# Altium PCB PCB_V1.0.PcbDoc (part 2 of 3)
Units mil, origin at the board's own origin, x right, y up, seen from the top; angles counter-clockwise.
Board outline 2129.51 x 1160.38 mil, 4 copper layers (L1, L2(GND), L3(PWR), L4), stack 62.45 mil thick; 40 components, 40 nets, 186 pads, 192 vias.
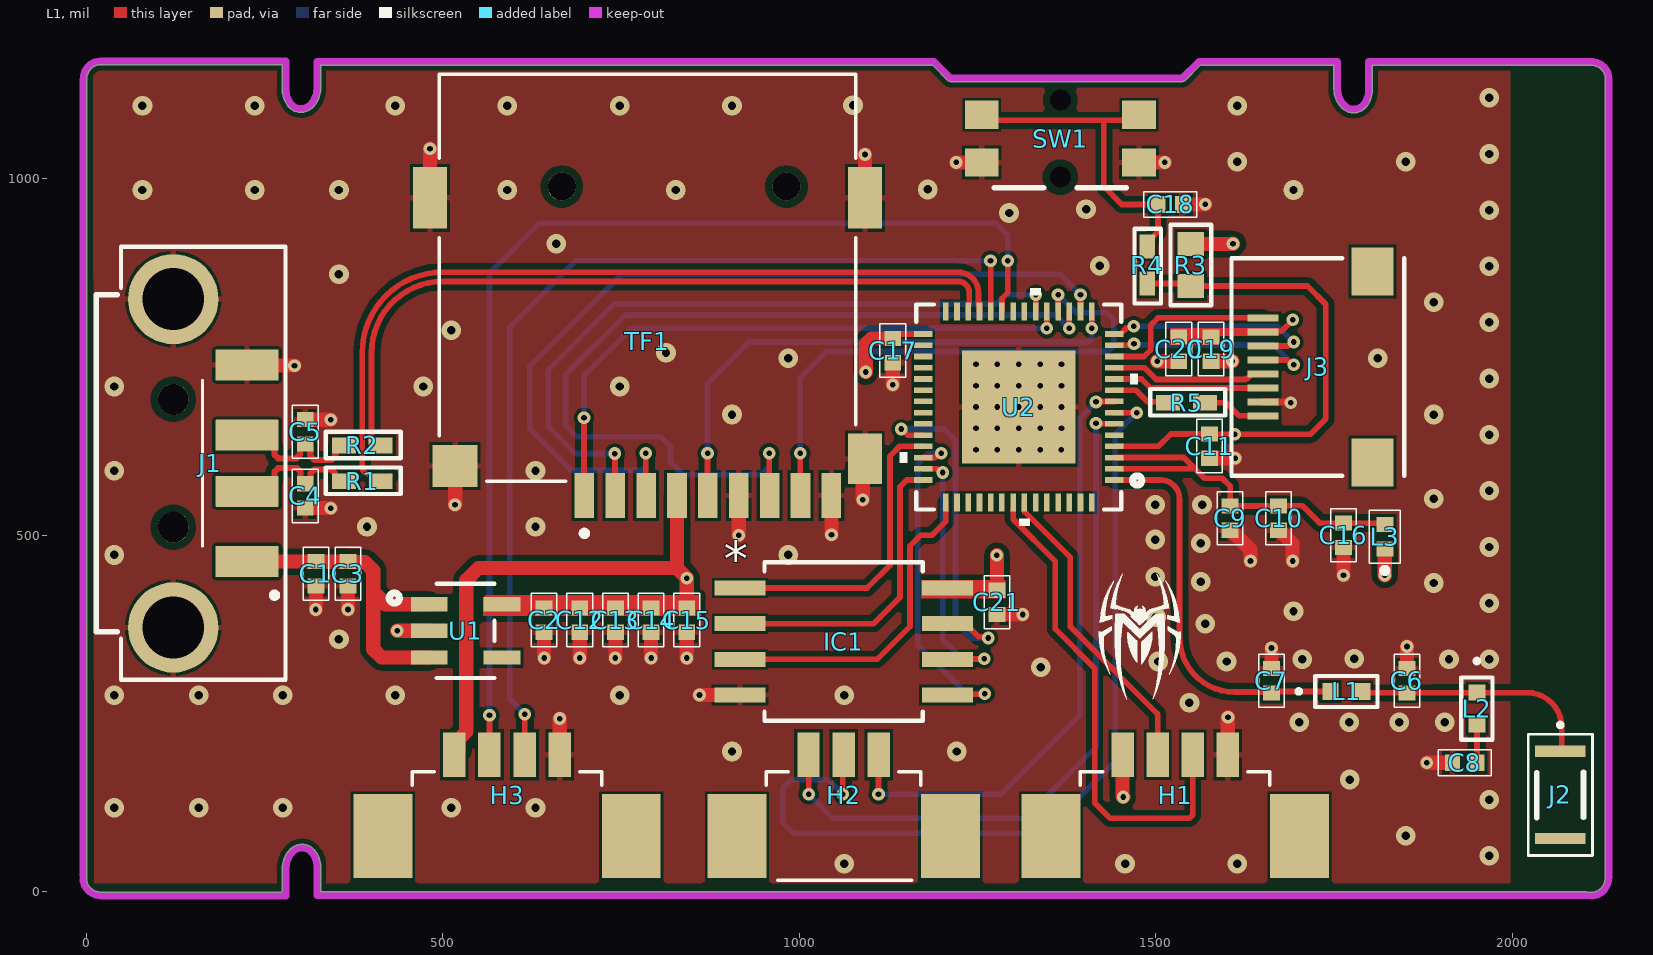
[diagram p0: L1 view]

## Part data (continued)
J1: "USB Connector, USB Type A, USB 2.0, Plug, 4 Positions, Surface Mount, Right Angle", LCSC Part=C7374540, Manufacturer=Samtec, Manufacturer Lifecycle Status=PRODUCTION, Max Operating Temperature=85°C, Max Voltage Rating (AC)=30V, Min Operating Temperature=-50°C, Supplier Part Number=SAM13046-ND, Category="Coaxial / RF Cable Assemblies", ComponentLink1Description=https://datasheet.octopart.com:443/USB-AM-S-S-B-SM1-Samtec-datasheet-97369336.pdf?src-supplier=Sager+Electronics, ComponentLink1URL=https://datasheet.octopart.com:443/USB-AM-S-S-B-SM1-Samtec-datasheet-97369336.pdf?src-supplier=Sager+Electronics, ComponentLink2Description=https://datasheet.octopart.com:443/USB-AM-S-S-B-SM1-Samtec-datasheet-154665717.pdf?src-supplier=Sager+Electronics, ComponentLink2URL=https://datasheet.octopart.com:443/USB-AM-S-S-B-SM1-Samtec-datasheet-154665717.pdf?src-supplier=Sager+Electronics, ComponentLink3Description=https://sigma.octopart.com:443/97369342/technical_drawing/Samtec-USB-AM-S-S-B-SM1.pdf?src-supplier=Samtec, ComponentLink3URL=https://sigma.octopart.com:443/97369342/technical_drawing/Samtec-USB-AM-S-S-B-SM1.pdf?src-supplier=Samtec, ComponentLink4Description=https://datasheet.octopart.com:443/USB-AM-S-S-B-SM1-Samtec-datasheet-150883678.pdf?src-supplier=Electro+Sonic, ComponentLink4URL=https://datasheet.octopart.com:443/USB-AM-S-S-B-SM1-Samtec-datasheet-150883678.pdf?src-supplier=Electro+Sonic, ComponentLink5Description=https://datasheet.octopart.com:443/USB-AM-S-S-B-SM1-Samtec-datasheet-130009934.pdf?src-supplier=Electro+Sonic, ComponentLink5URL=https://datasheet.octopart.com:443/USB-AM-S-S-B-SM1-Samtec-datasheet-130009934.pdf?src-supplier=Electro+Sonic, ComponentLink6Description=https://datasheet.octopart.com:443/USB-AM-S-S-B-SM1-Samtec-datasheet-21561734.pdf?src-supplier=Farnell, ComponentLink6URL=https://datasheet.octopart.com:443/USB-AM-S-S-B-SM1-Samtec-datasheet-21561734.pdf?src-supplier=Farnell, ComponentLink7Description=https://datasheet.octopart.com:443/USB-AM-S-S-B-SM1-Samtec-datasheet-180264035.pdf?src-supplier=JRH+Electronics, ComponentLink7URL=https://datasheet.octopart.com:443/USB-AM-S-S-B-SM1-Samtec-datasheet-180264035.pdf?src-supplier=JRH+Electronics, ComponentLink8Description=https://datasheet.octopart.com:443/USB-AM-S-S-B-SM1-Samtec-datasheet-120095689.pdf?src-supplier=Toby+Electronics, ComponentLink8URL=https://datasheet.octopart.com:443/USB-AM-S-S-B-SM1-Samtec-datasheet-120095689.pdf?src-supplier=Toby+Electronics, ComponentLink9Description=https://datasheet.octopart.com:443/USB-AM-S-S-B-SM1-Samtec-datasheet-116536465.pdf?src-supplier=Toby+Electronics, ComponentLink9URL=https://datasheet.octopart.com:443/USB-AM-S-S-B-SM1-Samtec-datasheet-116536465.pdf?src-supplier=Toby+Electronics, ComponentLink10Description=https://datasheet.octopart.com:443/USB-AM-S-S-B-SM1-Samtec-datasheet-13694303.pdf?src-supplier=_legacy+Avnet, ComponentLink10URL=https://datasheet.octopart.com:443/USB-AM-S-S-B-SM1-Samtec-datasheet-13694303.pdf?src-supplier=_legacy+Avnet, Contact Material=Bronze, Contact Plating=Gold, Depth=20.7mm, Gender=Male, Housing Material=Thermoplastic, Length=12.5mm, Lifecycle Status=Production, Manufacturer Part Number=USB-AM-S-S-B-SM1, Mounting Technology="Surface Mount", Number of Contacts=4, Number of Ports=1, Number of Terminals=4, Orientation="Right Angle", Packaging=Bulk, Pricing="1=3,56, 50=2,901, 100=2,462, 500=2,345 (USD)", Radiation Hardening=No, RoHS=Compliant, Stock=10, Supplier=DigiKey, Termination=Solder
J2: library part ANT3216LL00R2400A, "CERAMIC HELIX CHIP ANTENNA, 433MHZ, 1204; Available until stocks are exhausted", Clock Frequency=2.5GHz, LCSC Part=C22423581, Manufacturer="Yageo Group", Max Operating Temperature=105°C, Min Operating Temperature=-40°C, Supplier Part Number=311-4590-6-ND, Body Material=Ceramic, Category="RF Antennas", ComponentLink1Description=https://datasheet.octopart.com:443/ANT3216LL00R2400A-Pulse-datasheet-159152929.pdf?src-supplier=Electro+Sonic, ComponentLink1URL=https://datasheet.octopart.com:443/ANT3216LL00R2400A-Pulse-datasheet-159152929.pdf?src-supplier=Electro+Sonic, ComponentLink2Description=https://datasheet.octopart.com:443/ANT3216LL00R2400A-Yageo-datasheet-181541429.pdf?src-supplier=IHS, ComponentLink2URL=https://datasheet.octopart.com:443/ANT3216LL00R2400A-Yageo-datasheet-181541429.pdf?src-supplier=IHS, ComponentLink3Description=http://sigma.octopart.com:80/conflict_mineral_statement/Yageo-company-3.pdf?src-supplier=Compliance+Statements, ComponentLink3URL=http://sigma.octopart.com:80/conflict_mineral_statement/Yageo-company-3.pdf?src-supplier=Compliance+Statements, ComponentLink4Description=http://sigma.octopart.com:80/rohs_statement/Yageo-company-2.pdf?src-supplier=Compliance+Statements, ComponentLink4URL=http://sigma.octopart.com:80/rohs_statement/Yageo-company-2.pdf?src-supplier=Compliance+Statements, Country of Origin="Mainland China, Taiwan", Impedance=50Ω, Introduction Date=2013-03-27, Lifecycle Status=Production, Manufacturer Part Number=ANT3216LL00R2400A, Mounting Technology="Surface Mount", Number of Terminals=2, Pricing="1=0,46, 10=0,32, 25=0,2852, 100=0,2473, 250=0,22916, 500=0,21822, 1000=0,20921 (USD)", REACH SVHC=Yes, RoHS=Compliant, Stock=12714, Supplier=DigiKey
J3: "Conn FFC/FPC Connector SKT 8 POS 0.5mm Solder RA SMD Reel", Ambient Temperature Range High=85°C, Contact Resistance=50mΩ, Current Rating=500mA, Dielectric Material="Liquid Crystal Polymer", Flammability Rating="UL94 V-0", Insulation Resistance=100MΩ, LCSC Part=C3195305, Manufacturer="Omron Electronics Inc-EMC Div", Max Voltage Rating (DC)=5.05kV, Min Operating Temperature=-30°C, Supplier Part Number=OR1109CT-ND, Voltage Rating=50V, Actuator Material="Liquid Crystal Polymer, Polymer", Category="Card Edge Connectors", ComponentLink1Description=https://datasheet.octopart.com:443/XF2M-0815-1A-Omron-datasheet-67143946.pdf?src-supplier=Farnell, ComponentLink1URL=https://datasheet.octopart.com:443/XF2M-0815-1A-Omron-datasheet-67143946.pdf?src-supplier=Farnell, ComponentLink2Description=https://datasheet.octopart.com:443/XF2M-0815-1A-Omron-datasheet-48845614.pdf?src-supplier=element14+APAC, ComponentLink2URL=https://datasheet.octopart.com:443/XF2M-0815-1A-Omron-datasheet-48845614.pdf?src-supplier=element14+APAC, ComponentLink3Description=https://datasheet.octopart.com:443/XF2M-0815-1A-Omron-datasheet-21210793.pdf?src-supplier=Sager+Electronics, ComponentLink3URL=https://datasheet.octopart.com:443/XF2M-0815-1A-Omron-datasheet-21210793.pdf?src-supplier=Sager+Electronics, ComponentLink4Description=https://datasheet.octopart.com:443/XF2M-0815-1A-Omron-datasheet-150021820.pdf?src-supplier=Sager+Electronics, ComponentLink4URL=https://datasheet.octopart.com:443/XF2M-0815-1A-Omron-datasheet-150021820.pdf?src-supplier=Sager+Electronics, ComponentLink5Description=https://datasheet.octopart.com:443/XF2M-0815-1A-Omron-datasheet-140570497.pdf?src-supplier=Arrow.cn, ComponentLink5URL=https://datasheet.octopart.com:443/XF2M-0815-1A-Omron-datasheet-140570497.pdf?src-supplier=Arrow.cn, ComponentLink6Description=https://datasheet.octopart.com:443/XF2M-0815-1A-Omron-datasheet-17455137.pdf?src-supplier=Electro+Sonic, ComponentLink6URL=https://datasheet.octopart.com:443/XF2M-0815-1A-Omron-datasheet-17455137.pdf?src-supplier=Electro+Sonic, Contact Location=Side, Contact Material="Gold, Nickel", Contact Plating=Gold, Export Control Classification Number (ECCN) Code=EAR99, Gender=Receptacle, Height=3.1mm, Housing Material=Polymer, Introduction Date=2012-09-26, Lead Free="Lead Free", Lifecycle Status=Production, Manufacturer Part Number=XF2M-0815-1A, Max Current Rating=500mA, Max Operating Temperature=85°C, Mounting Technology="Surface Mount", Number of Contacts=8, Number of Positions=8, Number of Rows=1, Orientation="Right Angle", Packaging="Tape & Reel (TR)", Pitch=508µm, Plating Thickness=152.4nm, Pricing="1=1,33, 10=1,14, 50=1, 100=0,963, 1000=0,774, 10000=0,694 (USD)", REACH SVHC=Yes, RoHS=Compliant, Schedule B="8536694040, 8536694040|8536694040|8536694040|8536694040|8536694040", Stock=7488, Supplier=Digikey, Terminal Pitch=508µm, Termination=Solder, Voltage Rating (AC)=50V, Wire/Cable Type="Flat Flex"
L1: "General Purpose Inductor, 0.0027uH, 7.4074%, 1 Element, Ceramic-Core, SMD, 0402", Case Code (Imperial)=0402, Case Code (Metric)=1005, Current Rating=900mA, DC Resistance (DCR)=70mΩ, LCSC Part=C434841, Manufacturer=TDK, Manufacturer Lifecycle Status=PRODUCTION, Max Operating Temperature=125°C, Min Operating Temperature=-55°C, Self Resonant Frequency=6.5GHz, Supplier Part Number=445-172420-2-ND, Test Frequency=100MHz, Tolerance=0.07%, Case/Package=0402, Category="Fixed Inductors", ComponentLink1Description=https://datasheet.octopart.com:443/MHQ1005P2N7CT000-TDK-datasheet-181268076.pdf?src-supplier=IHS, ComponentLink1URL=https://datasheet.octopart.com:443/MHQ1005P2N7CT000-TDK-datasheet-181268076.pdf?src-supplier=IHS, ComponentLink2Description=https://datasheet.octopart.com:443/MHQ1005P2N7CT000-TDK-datasheet-155380095.pdf?src-supplier=ODG+(Origin+Data+Global), ComponentLink2URL=https://datasheet.octopart.com:443/MHQ1005P2N7CT000-TDK-datasheet-155380095.pdf?src-supplier=ODG+(Origin+Data+Global), ComponentLink3Description=https://datasheet.octopart.com:443/MHQ1005P2N7CT000-TDK-datasheet-136874815.pdf?src-supplier=TME, ComponentLink3URL=https://datasheet.octopart.com:443/MHQ1005P2N7CT000-TDK-datasheet-136874815.pdf?src-supplier=TME, ComponentLink4Description=https://datasheet.octopart.com:443/MHQ1005P2N7CT000-TDK-datasheet-41546101.pdf?src-supplier=Future+Electronics, ComponentLink4URL=https://datasheet.octopart.com:443/MHQ1005P2N7CT000-TDK-datasheet-41546101.pdf?src-supplier=Future+Electronics, Core Material=Ceramic, Export Control Classification Number (ECCN) Code=EAR99, Harmonized Tariff Schedule (HTS) Code=8504.50.80.00, Height=500µm, Height - Seated (Max)=609.6µm, Introduction Date=2013-10-01, Length=1mm, Lifecycle Status=Production, Manufacturer Part Number=MHQ1005P2N7CT000, Max Current Rating=900mA, Max DC Current=900mA, Max Length=1.05mm, Max Width=650µm, Min Length=950µm, Min Width=550µm, Mounting Technology="Surface Mount", Number of Circuits=1, Number of Terminals=2, Packaging="Cut Tape (CT)", Pricing="10000=0,05758, 20000=0,0543, 30000=0,05247, 50000=0,05025, 70000=0,04884, 100000=0,04739 (USD)", Q Factor=23, REACH SVHC=Yes, RoHS=Compliant, Shielding=Unshielded, Stock=10000, Supplier=DigiKey, Termination=SMD/SMT, Weight=652.039032µg, Width=600µm
L3: "General Purpose Inductor, 0.002uH, 10%, 1 Element, Reflow soldering, 1005/0402", Case/Package=0402, Current Rating=900mA, DC Resistance (DCR)=90mΩ, LCSC Part=C2043639, Manufacturer=Murata, Manufacturer Lifecycle Status="IN PRODUCTION", Max Operating Temperature=125°C, Min Operating Temperature=-55°C, Self Resonant Frequency=6GHz, Supplier Part Number=490-15076-6-ND, Test Frequency=100MHz, Tolerance=10%, Category="Fixed Inductors", ComponentLink1Description=https://datasheet.octopart.com:443/LQG15HN2N0C02D-Murata-datasheet-141286051.pdf?src-supplier=Ciiva, ComponentLink1URL=https://datasheet.octopart.com:443/LQG15HN2N0C02D-Murata-datasheet-141286051.pdf?src-supplier=Ciiva, ComponentLink2Description=https://datasheet.octopart.com:443/LQG15HN2N0C02D-Murata-datasheet-140712106.pdf?src-supplier=Ciiva, ComponentLink2URL=https://datasheet.octopart.com:443/LQG15HN2N0C02D-Murata-datasheet-140712106.pdf?src-supplier=Ciiva, ComponentLink3Description=https://datasheet.octopart.com:443/LQG15HN2N0C02D-Murata-datasheet-138753224.pdf?src-supplier=Ciiva, ComponentLink3URL=https://datasheet.octopart.com:443/LQG15HN2N0C02D-Murata-datasheet-138753224.pdf?src-supplier=Ciiva, ComponentLink4Description=https://datasheet.octopart.com:443/LQG15HN2N0C02D-Murata-datasheet-142219898.pdf?src-supplier=Arrow.cn, ComponentLink4URL=https://datasheet.octopart.com:443/LQG15HN2N0C02D-Murata-datasheet-142219898.pdf?src-supplier=Arrow.cn, ComponentLink5Description=https://datasheet.octopart.com:443/LQG15HN2N0C02D-Murata-datasheet-140568920.pdf?src-supplier=Arrow.cn, ComponentLink5URL=https://datasheet.octopart.com:443/LQG15HN2N0C02D-Murata-datasheet-140568920.pdf?src-supplier=Arrow.cn, ComponentLink6Description=https://datasheet.octopart.com:443/LQG15HN2N0C02D-Murata-datasheet-145449623.pdf?src-supplier=Geoflip, ComponentLink6URL=https://datasheet.octopart.com:443/LQG15HN2N0C02D-Murata-datasheet-145449623.pdf?src-supplier=Geoflip, ComponentLink7Description=https://datasheet.octopart.com:443/LQG15HN2N0C02D-Murata-datasheet-140317006.pdf?src-supplier=Farnell, ComponentLink7URL=https://datasheet.octopart.com:443/LQG15HN2N0C02D-Murata-datasheet-140317006.pdf?src-supplier=Farnell, ComponentLink8Description=http://sigma.octopart.com:80/reach_statement/Murata-company-16.pdf?src-supplier=Compliance+Statements, ComponentLink8URL=http://sigma.octopart.com:80/reach_statement/Murata-company-16.pdf?src-supplier=Compliance+Statements, Core Material=Air, Country of Origin=Japan, ESR=90mΩ, Export Control Classification Number (ECCN) Code=EAR99, Harmonized Tariff Schedule (HTS) Code=8504.50.80.00, Height=500µm, Introduction Date=2018-02-22, Length=1mm, Lifecycle Status=Production, Manufacturer Part Number=LQG15HN2N0C02D, Max Current Rating=900mA, Number of Circuits=1, Number of Terminals=2, Pricing="1=0,1, 10=0,045, 25=0,0416, 50=0,039, 100=0,0368, 250=0,03408, 500=0,03212, 1000=0,03028, 2500=0,02801 (USD)", Q Factor=8, REACH SVHC=Yes, RMS Current (Irms)=900mA, RoHS=Compliant, Schedule B="8504500000, 8504500000|8504500000|8504500000|8504500000|8504500000", Shielding=Unshielded, Stock=65005, Supplier=DigiKey, Width=500µm
R1 R2 R4 R5: "GENERAL PURPOSE CHIP RESISTOR Metal Glaze/thick Film, 0.0625W, 0ohm, Surface Mount, 0402", Case Code (Imperial)=0402, LCSC Part=C60485, Manufacturer="Yageo Group", Max Operating Temperature=155°C, Max Power Dissipation=63mW, Min Operating Temperature=-55°C, Power Rating=62.5mW, Supplier Part Number=311-0.0JRDKR-ND, Temperature Coefficient=200ppm/°C, Tolerance=5%, Voltage Rating=50V, Case/Package=0402, Category="Chip SMD Resistors", China RoHS=Non-Compliant, ComponentLink1Description=https://datasheet.octopart.com:443/RC0402JR-070RL-Yageo-datasheet-182189538.pdf?src-supplier=IHS, ComponentLink1URL=https://datasheet.octopart.com:443/RC0402JR-070RL-Yageo-datasheet-182189538.pdf?src-supplier=IHS, ComponentLink2Description=https://datasheet.octopart.com:443/RC0402JR-070RL-Yageo-datasheet-10408619.pdf?src-supplier=Newark, ComponentLink2URL=https://datasheet.octopart.com:443/RC0402JR-070RL-Yageo-datasheet-10408619.pdf?src-supplier=Newark, ComponentLink3Description=https://datasheet.octopart.com:443/RC0402JR-070RL-Yageo-Group-datasheet-181964826.pdf?src-supplier=Newark, ComponentLink3URL=https://datasheet.octopart.com:443/RC0402JR-070RL-Yageo-Group-datasheet-181964826.pdf?src-supplier=Newark, ComponentLink4Description=https://datasheet.octopart.com:443/RC0402JR-070RL-Yageo-Group-datasheet-190305687.pdf?src-supplier=Future+Electronics, ComponentLink4URL=https://datasheet.octopart.com:443/RC0402JR-070RL-Yageo-Group-datasheet-190305687.pdf?src-supplier=Future+Electronics, ComponentLink5Description=https://datasheet.octopart.com:443/RC0402JR-070RL-Yageo-datasheet-164759695.pdf?src-supplier=Future+Electronics, ComponentLink5URL=https://datasheet.octopart.com:443/RC0402JR-070RL-Yageo-datasheet-164759695.pdf?src-supplier=Future+Electronics, ComponentLink6Description=https://datasheet.octopart.com:443/RC0402JR-070RL-Yageo-datasheet-137700087.pdf?src-supplier=Future+Electronics, ComponentLink6URL=https://datasheet.octopart.com:443/RC0402JR-070RL-Yageo-datasheet-137700087.pdf?src-supplier=Future+Electronics, ComponentLink7Description=https://datasheet.octopart.com:443/RC0402JR-070RL-Yageo-datasheet-12531192.pdf?src-supplier=Seeed+Studio, ComponentLink7URL=https://datasheet.octopart.com:443/RC0402JR-070RL-Yageo-datasheet-12531192.pdf?src-supplier=Seeed+Studio, ComponentLink8Description=https://datasheet.octopart.com:443/RC0402JR-070RL-Yageo-datasheet-8324527.pdf?src-supplier=TME, ComponentLink8URL=https://datasheet.octopart.com:443/RC0402JR-070RL-Yageo-datasheet-8324527.pdf?src-supplier=TME, ComponentLink9Description=https://datasheet.octopart.com:443/RC0402JR-070RL-Yageo-datasheet-62067350.pdf?src-supplier=Farnell, ComponentLink9URL=https://datasheet.octopart.com:443/RC0402JR-070RL-Yageo-datasheet-62067350.pdf?src-supplier=Farnell, ComponentLink10Description=https://datasheet.octopart.com:443/RC0402JR-070RL-Yageo-datasheet-8329306.pdf?src-supplier=element14, ComponentLink10URL=https://datasheet.octopart.com:443/RC0402JR-070RL-Yageo-datasheet-8329306.pdf?src-supplier=element14, ComponentLink11Description=https://datasheet.octopart.com:443/RC0402JR-070RL-Yageo-datasheet-505231.pdf?src-supplier=element14, ComponentLink11URL=https://datasheet.octopart.com:443/RC0402JR-070RL-Yageo-datasheet-505231.pdf?src-supplier=element14, ComponentLink12Description=https://datasheet.octopart.com:443/RC0402JR-070RL-Yageo-datasheet-175423674.pdf?src-supplier=SOS+electronic, ComponentLink12URL=https://datasheet.octopart.com:443/RC0402JR-070RL-Yageo-datasheet-175423674.pdf?src-supplier=SOS+electronic, ComponentLink13Description=https://datasheet.octopart.com/RC0402JR-070RL-Yageo-datasheet-73766026.pdf, ComponentLink13URL=https://datasheet.octopart.com/RC0402JR-070RL-Yageo-datasheet-73766026.pdf, ComponentLink14Description=http://sigma.octopart.com:80/conflict_mineral_statement/Yageo-company-3.pdf?src-supplier=Compliance+Statements, ComponentLink14URL=http://sigma.octopart.com:80/conflict_mineral_statement/Yageo-company-3.pdf?src-supplier=Compliance+Statements, ComponentLink15Description=http://sigma.octopart.com:80/rohs_statement/Yageo-company-2.pdf?src-supplier=Compliance+Statements, ComponentLink15URL=http://sigma.octopart.com:80/rohs_statement/Yageo-company-2.pdf?src-supplier=Compliance+Statements, Composition="Thick Film", Contact Plating=Tin, Depth=500µm, Features="Moisture Resistant", Height=350µm, Lead Free="Lead Free", Length=1mm, Lifecycle Status=Production, Manufacturer Part Number=RC0402JR-070RL, Military Standard=Not, Mounting Technology="Surface Mount", Number of Terminals=2, Number of Terminations=2, Packaging="Tape & Reel", Pins=2, Pricing="1=0,1, 10=0,010, 25=0,0064, 50=0,0056, 100=0,0048, 250=0,00404, 500=0,00356, 1000=0,00313, 5000=0,00237 (USD)", Radiation Hardening=No, REACH SVHC=Yes, RoHS=Compliant, Schedule B="8533290000, 8533290000|8533290000, 8533290000|8533290000|8533290000, 8533290000|8533290000|8533290000|8533290000", Stock=12719023, Supplier=DigiKey, Termination=SMD/SMT, Voltage Rating (DC)=50V, Width=500µm
R3: "Fixed Resistor, Metal Glaze/Thick Film, 0.1W, 10000ohm, 75V, 1% +/-Tol, Surface Mount, 0603", Case Code (Imperial)=0603, LCSC Part=C844918, Manufacturer=Vishay, Max Operating Temperature=155°C, Max Power Dissipation=100mW, Min Operating Temperature=-55°C, Ratings=AEC-Q200, Supplier Part Number=541-10.0KHCT-ND, Temperature Coefficient=100ppm/°C, Tolerance=1%, Voltage Rating=75V, Case/Package=0603, Category="Chip SMD Resistors", China RoHS=Non-Compliant, ComponentLink1Description=https://datasheet.octopart.com:443/CRCW060310K0FKEA-Vishay-datasheet-175423584.pdf?src-supplier=IHS, ComponentLink1URL=https://datasheet.octopart.com:443/CRCW060310K0FKEA-Vishay-datasheet-175423584.pdf?src-supplier=IHS, ComponentLink2Description=https://datasheet.octopart.com:443/CRCW060310K0FKEA-Vishay-datasheet-5300368.pdf?src-supplier=Future+Electronics, ComponentLink2URL=https://datasheet.octopart.com:443/CRCW060310K0FKEA-Vishay-datasheet-5300368.pdf?src-supplier=Future+Electronics, ComponentLink3Description=https://datasheet.octopart.com:443/CRCW060310K0FKEA-Vishay-datasheet-62316122.pdf?src-supplier=Future+Electronics, ComponentLink3URL=https://datasheet.octopart.com:443/CRCW060310K0FKEA-Vishay-datasheet-62316122.pdf?src-supplier=Future+Electronics, ComponentLink4Description=https://datasheet.octopart.com:443/CRCW060310K0FKEA-Vishay-datasheet-141434677.pdf?src-supplier=Upverter, ComponentLink4URL=https://datasheet.octopart.com:443/CRCW060310K0FKEA-Vishay-datasheet-141434677.pdf?src-supplier=Upverter, ComponentLink5Description=https://datasheet.octopart.com:443/CRCW060310K0FKEA-Vishay-datasheet-83961561.pdf?src-supplier=Newark, ComponentLink5URL=https://datasheet.octopart.com:443/CRCW060310K0FKEA-Vishay-datasheet-83961561.pdf?src-supplier=Newark, ComponentLink6Description=https://datasheet.octopart.com:443/CRCW060310K0FKEA-Vishay-datasheet-14722531.pdf?src-supplier=Newark, ComponentLink6URL=https://datasheet.octopart.com:443/CRCW060310K0FKEA-Vishay-datasheet-14722531.pdf?src-supplier=Newark, ComponentLink7Description=https://datasheet.octopart.com:443/CRCW060310K0FKEA-Vishay-datasheet-11516975.pdf?src-supplier=Newark, ComponentLink7URL=https://datasheet.octopart.com:443/CRCW060310K0FKEA-Vishay-datasheet-11516975.pdf?src-supplier=Newark, ComponentLink8Description=https://datasheet.octopart.com:443/CRCW060310K0FKEA-Vishay-datasheet-41302739.pdf?src-supplier=Newark, ComponentLink8URL=https://datasheet.octopart.com:443/CRCW060310K0FKEA-Vishay-datasheet-41302739.pdf?src-supplier=Newark, ComponentLink9Description=https://datasheet.octopart.com:443/CRCW060310K0FKEA-Vishay-datasheet-33013972.pdf?src-supplier=Newark, ComponentLink9URL=https://datasheet.octopart.com:443/CRCW060310K0FKEA-Vishay-datasheet-33013972.pdf?src-supplier=Newark, ComponentLink10Description=https://datasheet.octopart.com:443/CRCW060310K0FKEA-Vishay-datasheet-21226360.pdf?src-supplier=Newark, ComponentLink10URL=https://datasheet.octopart.com:443/CRCW060310K0FKEA-Vishay-datasheet-21226360.pdf?src-supplier=Newark, ComponentLink11Description=https://datasheet.octopart.com:443/CRCW060310K0FKEA-Vishay-datasheet-62317933.pdf?src-supplier=element14+APAC, ComponentLink11URL=https://datasheet.octopart.com:443/CRCW060310K0FKEA-Vishay-datasheet-62317933.pdf?src-supplier=element14+APAC, ComponentLink12Description=https://datasheet.octopart.com:443/CRCW060310K0FKEA-Vishay-datasheet-16179825.pdf?src-supplier=element14+APAC, ComponentLink12URL=https://datasheet.octopart.com:443/CRCW060310K0FKEA-Vishay-datasheet-16179825.pdf?src-supplier=element14+APAC, ComponentLink13Description=https://datasheet.octopart.com:443/CRCW060310K0FKEA-Vishay-datasheet-66077789.pdf?src-supplier=element14+APAC, ComponentLink13URL=https://datasheet.octopart.com:443/CRCW060310K0FKEA-Vishay-datasheet-66077789.pdf?src-supplier=element14+APAC, ComponentLink14Description=https://datasheet.octopart.com:443/CRCW060310K0FKEA-Vishay-datasheet-5306405.pdf?src-supplier=RS+(Formerly+Allied+Electronics), ComponentLink14URL=https://datasheet.octopart.com:443/CRCW060310K0FKEA-Vishay-datasheet-5306405.pdf?src-supplier=RS+(Formerly+Allied+Electronics), ComponentLink15Description=https://datasheet.octopart.com:443/CRCW060310K0FKEA-Vishay-Dale-datasheet-47688880.pdf?src-supplier=RS+(Formerly+Allied+Electronics), ComponentLink15URL=https://datasheet.octopart.com:443/CRCW060310K0FKEA-Vishay-Dale-datasheet-47688880.pdf?src-supplier=RS+(Formerly+Allied+Electronics), ComponentLink16Description=https://datasheet.octopart.com:443/CRCW060310K0FKEA-Vishay-datasheet-12001583.pdf?src-supplier=RS+(Formerly+Allied+Electronics), ComponentLink16URL=https://datasheet.octopart.com:443/CRCW060310K0FKEA-Vishay-datasheet-12001583.pdf?src-supplier=RS+(Formerly+Allied+Electronics), ComponentLink17Description=https://datasheet.octopart.com:443/CRCW060310K0FKEA-Vishay-datasheet-17834126.pdf?src-supplier=TME, ComponentLink17URL=https://datasheet.octopart.com:443/CRCW060310K0FKEA-Vishay-datasheet-17834126.pdf?src-supplier=TME, ComponentLink18Description=https://datasheet.octopart.com/D-CRCW-e3-Standard-Thick-Film-Chip-Resistors-Vishay-datasheet-family-64.pdf, ComponentLink18URL=https://datasheet.octopart.com/D-CRCW-e3-Standard-Thick-Film-Chip-Resistors-Vishay-datasheet-family-64.pdf, ComponentLink19Description=https://datasheet.octopart.com:443/CRCW060310K0FKEA-Vishay-datasheet-13242068.pdf?src-supplier=Farnell, ComponentLink19URL=https://datasheet.octopart.com:443/CRCW060310K0FKEA-Vishay-datasheet-13242068.pdf?src-supplier=Farnell, ComponentLink20Description=https://datasheet.octopart.com:443/CRCW060310K0FKEA-Vishay-datasheet-13195083.pdf?src-supplier=Farnell, ComponentLink20URL=https://datasheet.octopart.com:443/CRCW060310K0FKEA-Vishay-datasheet-13195083.pdf?src-supplier=Farnell, ComponentLink21Description=https://datasheet.octopart.com:443/CRCW060310K0FKEA-Vishay-datasheet-13034211.pdf?src-supplier=Farnell, ComponentLink21URL=https://datasheet.octopart.com:443/CRCW060310K0FKEA-Vishay-datasheet-13034211.pdf?src-supplier=Farnell, ComponentLink22Description=https://datasheet.octopart.com:443/CRCW060310K0FKEA-Vishay-datasheet-12600034.pdf?src-supplier=Farnell, ComponentLink22URL=https://datasheet.octopart.com:443/CRCW060310K0FKEA-Vishay-datasheet-12600034.pdf?src-supplier=Farnell, ComponentLink23Description=https://datasheet.octopart.com:443/CRCW060310K0FKEA-Vishay-datasheet-12532161.pdf?src-supplier=Farnell, ComponentLink23URL=https://datasheet.octopart.com:443/CRCW060310K0FKEA-Vishay-datasheet-12532161.pdf?src-supplier=Farnell, ComponentLink24Description=https://datasheet.octopart.com:443/CRCW060310K0FKEA-Vishay-datasheet-12517896.pdf?src-supplier=Farnell, ComponentLink24URL=https://datasheet.octopart.com:443/CRCW060310K0FKEA-Vishay-datasheet-12517896.pdf?src-supplier=Farnell, ComponentLink25Description=https://datasheet.octopart.com:443/CRCW060310K0FKEA-Vishay-datasheet-12509762.pdf?src-supplier=Farnell, ComponentLink25URL=https://datasheet.octopart.com:443/CRCW060310K0FKEA-Vishay-datasheet-12509762.pdf?src-supplier=Farnell, ComponentLink26Description=https://datasheet.octopart.com:443/CRCW060310K0FKEA-Vishay-datasheet-10322335.pdf?src-supplier=Farnell, ComponentLink26URL=https://datasheet.octopart.com:443/CRCW060310K0FKEA-Vishay-datasheet-10322335.pdf?src-supplier=Farnell, ComponentLink27Description=https://datasheet.octopart.com:443/CRCW060310K0FKEA-Vishay-datasheet-8788789.pdf?src-supplier=Farnell, ComponentLink27URL=https://datasheet.octopart.com:443/CRCW060310K0FKEA-Vishay-datasheet-8788789.pdf?src-supplier=Farnell, ComponentLink28Description=https://datasheet.octopart.com:443/CRCW060310K0FKEA-Vishay-datasheet-8361388.pdf?src-supplier=Farnell, ComponentLink28URL=https://datasheet.octopart.com:443/CRCW060310K0FKEA-Vishay-datasheet-8361388.pdf?src-supplier=Farnell, ComponentLink29Description=https://datasheet.octopart.com:443/CRCW060310K0FKEA-Vishay-datasheet-546287.pdf?src-supplier=Farnell, ComponentLink29URL=https://datasheet.octopart.com:443/CRCW060310K0FKEA-Vishay-datasheet-546287.pdf?src-supplier=Farnell, ComponentLink30Description=https://datasheet.octopart.com:443/CRCW060310K0FKEA-Vishay-datasheet-8619608.pdf?src-supplier=element14, ComponentLink30URL=https://datasheet.octopart.com:443/CRCW060310K0FKEA-Vishay-datasheet-8619608.pdf?src-supplier=element14, ComponentLink31Description=https://datasheet.octopart.com:443/CRCW060310K0FKEA-Vishay-datasheet-5377433.pdf?src-supplier=Garrett, ComponentLink31URL=https://datasheet.octopart.com:443/CRCW060310K0FKEA-Vishay-datasheet-5377433.pdf?src-supplier=Garrett, ComponentLink32Description=https://datasheet.octopart.com:443/CRCW060310K0FKEA-Vishay-datasheet-148188.pdf?src-supplier=Garrett, ComponentLink32URL=https://datasheet.octopart.com:443/CRCW060310K0FKEA-Vishay-datasheet-148188.pdf?src-supplier=Garrett, ComponentLink33Description=https://datasheet.octopart.com:443/CRCW060310K0FKEA-Vishay-datasheet-30224.pdf?src-supplier=Garrett, ComponentLink33URL=https://datasheet.octopart.com:443/CRCW060310K0FKEA-Vishay-datasheet-30224.pdf?src-supplier=Garrett, ComponentLink34Description=https://datasheet.octopart.com:443/CRCW060310K0FKEA-Vishay-datasheet-11835177.pdf?src-supplier=Arrow+Electronics, ComponentLink34URL=https://datasheet.octopart.com:443/CRCW060310K0FKEA-Vishay-datasheet-11835177.pdf?src-supplier=Arrow+Electronics, ComponentLink35Description=http://sigma.octopart.com:80/rohs_certificate/D-CRCW-e3-Standard-Thick-Film-Chip-Resistors-Vishay-family-102.pdf?src-supplier=Compliance+Statements, ComponentLink35URL=http://sigma.octopart.com:80/rohs_certificate/D-CRCW-e3-Standard-Thick-Film-Chip-Resistors-Vishay-family-102.pdf?src-supplier=Compliance+Statements, Composition="Thick Film", Contact Plating="Lead, Tin", Country of Origin="Israel, Taiwan", Depth=850µm, Export Control Classification Number (ECCN) Code=EAR99, Features="Automotive AEC-Q200", Harmonized Tariff Schedule (HTS) Code=8533.21.00.30, Height=450µm, Introduction Date=2005-02-16, Lead Free="Lead Free", Length=1.55mm, Lifecycle Status=Production, Manufacturer Part Number=CRCW060310K0FKEA, Military Standard=Not, Mounting Technology="Surface Mount", Number of Terminals=2, Number of Terminations=2, Packaging="Tape and Reel", Pins=2, Power Rating=100mW, Pricing="1=0,1, 10=0,032, 25=0,024, 50=0,0194, 100=0,0158, 250=0,0124, 500=0,01046, 1000=0,00893 (USD)", Radiation Hardening=No, REACH SVHC=Yes, RoHS=Compliant, Schedule B="8533210045, 8533210045|8533210045|8533210045|8533210045|8533210045|8533210045|8533210045|8533210045|8533210045|8533210045|8533210045|8533210045|8533210045|8533210045|8533210045|8533210045|8533210045|8533210045|8533210045|8533210045|8533210045|8533210045|8533210045|85", Stock=5381974, Supplier=DigiKey, Termination=SMD/SMT, Voltage Rating (DC)=75V, Weight=2.012816mg, Width=850µm, Working Voltage=75V
SW1: "Wurth Elektronik tactile switch, Solder terminal, size 4.5 x 4.7mm, surface, SPST", Contact Current Rating=50mA, Contact Resistance=100mΩ, Insulation Resistance=100MΩ, LCSC Part=C5143619, Manufacturer="Wurth Elektronik", Manufacturer Lifecycle Status=ACTIVE, Max Operating Temperature=85°C, Min Operating Temperature=-40°C, Supplier Part Number=732-7059-2-ND, Voltage Rating=12V, Category="Tactile Switches", ComponentLink1Description=https://datasheet.octopart.com:443/436331045822-W%C3%BCrth-Elektronik-datasheet-154248855.pdf?src-supplier=Wurth+Elektronik, ComponentLink1URL=https://datasheet.octopart.com:443/436331045822-W%C3%BCrth-Elektronik-datasheet-154248855.pdf?src-supplier=Wurth+Elektronik, ComponentLink2Description=https://datasheet.octopart.com:443/436331045822-W%C3%BCrth-Elektronik-datasheet-141445726.pdf?src-supplier=HQonline, ComponentLink2URL=https://datasheet.octopart.com:443/436331045822-W%C3%BCrth-Elektronik-datasheet-141445726.pdf?src-supplier=HQonline, ComponentLink3Description=https://datasheet.octopart.com:443/436331045822-W%C3%BCrth-Elektronik-Midcom-datasheet-10030364.pdf?src-supplier=element14+APAC, ComponentLink3URL=https://datasheet.octopart.com:443/436331045822-W%C3%BCrth-Elektronik-Midcom-datasheet-10030364.pdf?src-supplier=element14+APAC, ComponentLink4Description=https://datasheet.octopart.com:443/436331045822-W%C3%BCrth-Elektronik-datasheet-41196550.pdf?src-supplier=element14+APAC, ComponentLink4URL=https://datasheet.octopart.com:443/436331045822-W%C3%BCrth-Elektronik-datasheet-41196550.pdf?src-supplier=element14+APAC, Contact Plating=Silver, Current Rating=50mA, Height=1.65mm, Life (Cycles)=100kcycles, Lifecycle Status=Production, Manufacturer Part Number=436331045822, Mounting Technology="Surface Mount", Packaging="Tape and Reel", Pricing="3300=0,32965 (USD)", RoHS=Compliant, Stock=30789, Supplier=DigiKey, Voltage Rating (DC)=12V, Width=4.7mm, YEOL="1 = Estimated lifetime > 10 years"
TF1: library part MSD-1-A, "Card Connector, Micro Sd, Push In Auto Eject Out Rohs Compliant: Yes", LCSC Part=C20619272, Manufacturer="Same Sky", Supplier Part Number=2223-MSD-1-ADKR-ND, Category="Card Edge Connectors", ComponentLink1Description=https://datasheet.octopart.com:443/MSD-1-A-Same-Sky-datasheet-188826037.pdf?src-supplier=Future+Electronics, ComponentLink1URL=https://datasheet.octopart.com:443/MSD-1-A-Same-Sky-datasheet-188826037.pdf?src-supplier=Future+Electronics, ComponentLink2Description=https://datasheet.octopart.com:443/MSD-1-A-Same-Sky-datasheet-181916823.pdf?src-supplier=Same+Sky, ComponentLink2URL=https://datasheet.octopart.com:443/MSD-1-A-Same-Sky-datasheet-181916823.pdf?src-supplier=Same+Sky, ComponentLink3Description=https://datasheet.octopart.com:443/MSD-1-A-Same-Sky-datasheet-187906752.pdf?src-supplier=Master+Electronics, ComponentLink3URL=https://datasheet.octopart.com:443/MSD-1-A-Same-Sky-datasheet-187906752.pdf?src-supplier=Master+Electronics, ComponentLink4Description=https://datasheet.octopart.com:443/MSD-1-A-Same-Sky-datasheet-189105030.pdf?src-supplier=Master+Electronics, ComponentLink4URL=https://datasheet.octopart.com:443/MSD-1-A-Same-Sky-datasheet-189105030.pdf?src-supplier=Master+Electronics, ComponentLink5Description=https://datasheet.octopart.com:443/MSD-1-A-Same-Sky-datasheet-192927133.pdf?src-supplier=Farnell, ComponentLink5URL=https://datasheet.octopart.com:443/MSD-1-A-Same-Sky-datasheet-192927133.pdf?src-supplier=Farnell, ComponentLink6Description=https://octopart.com:443/opatz8j6/c1?t=vp1p1RiQ7_bbECyTA0y4sfTKdNK0uxHJB4IJybVem8wfn_d81AkevM-28rbvRvGobWwflIHzG1kFMVOfj4kHg7XvkbfSCEJ7QJUOw8RagXeSWULw5ToeuFDdJR7Bt4vxDtry0ssBHcqByyX6VfftwN1L4faraza0AI-7RGbWMwA6F9LSqLt9_EMr0BxlEhXuXrshFT8wtW-WV5rQURwZJFG16ertrOprtftK68kM6a6LFeToBh8QSflZEyNvhx9JPCtmtoosfXqgwYVYCg7S3alAAaytfdeoLFI4QoT-ekVsdXkV83oacCLK0qWz3So_Qz_4GnTlkdSuyzdB_i-sEeuXWT3vb9ZdCw&src-supplier=Compliance+Statements, ComponentLink6URL=https://octopart.com:443/opatz8j6/c1?t=vp1p1RiQ7_bbECyTA0y4sfTKdNK0uxHJB4IJybVem8wfn_d81AkevM-28rbvRvGobWwflIHzG1kFMVOfj4kHg7XvkbfSCEJ7QJUOw8RagXeSWULw5ToeuFDdJR7Bt4vxDtry0ssBHcqByyX6VfftwN1L4faraza0AI-7RGbWMwA6F9LSqLt9_EMr0BxlEhXuXrshFT8wtW-WV5rQURwZJFG16ertrOprtftK68kM6a6LFeToBh8QSflZEyNvhx9JPCtmtoosfXqgwYVYCg7S3alAAaytfdeoLFI4QoT-ekVsdXkV83oacCLK0qWz3So_Qz_4GnTlkdSuyzdB_i-sEeuXWT3vb9ZdCw&src-supplier=Compliance+Statements, ComponentLink7Description=https://octopart.com:443/opatz8j6/c1?t=wAi6ISJASBnr8eO6lSjSIHP2me3m_9JM9t7W5VqSuSqxXYYJcLah3NUVD-7KOeeDFDGTRMzH8uuSVpkC-dK8fDh7z78_Zz7yIXmwbgIJI1qZCq7xwXiaEBLQXT6ZnDMy6rrDwlb80FwwLiQM50BkdkbR5EeE1LfLeWHnwravg99_jLWlkSIiScvx2zQpJINNM4l5hIZMqDUJfGPmTvGFOpba4p3TKJetJ1SK5RMzhW7EBLCMyaFc11RY6XyCtek_Rl1wWLfJ0x3653ljfiWvaBt52Rr3c_7yFcHOKK0ZDwbDeFPkBPIVfLA_uDjBt4Uz3XRATwQr3zhnt-anWoerKFWB3yJpHzj1KQ&src-supplier=Compliance+Statements, ComponentLink7URL=https://octopart.com:443/opatz8j6/c1?t=wAi6ISJASBnr8eO6lSjSIHP2me3m_9JM9t7W5VqSuSqxXYYJcLah3NUVD-7KOeeDFDGTRMzH8uuSVpkC-dK8fDh7z78_Zz7yIXmwbgIJI1qZCq7xwXiaEBLQXT6ZnDMy6rrDwlb80FwwLiQM50BkdkbR5EeE1LfLeWHnwravg99_jLWlkSIiScvx2zQpJINNM4l5hIZMqDUJfGPmTvGFOpba4p3TKJetJ1SK5RMzhW7EBLCMyaFc11RY6XyCtek_Rl1wWLfJ0x3653ljfiWvaBt52Rr3c_7yFcHOKK0ZDwbDeFPkBPIVfLA_uDjBt4Uz3XRATwQr3zhnt-anWoerKFWB3yJpHzj1KQ&src-supplier=Compliance+Statements, Lifecycle Status=Production, Manufacturer Part Number=MSD-1-A, Number of Contacts=9, Pins=9, Pricing="1=0,38, 10=0,337, 25=0,3212, 50=0,3096, 100=0,2985, 250=0,28452, 500=0,27438 (USD)", RoHS=Compliant, Stock=22918, Supplier=DigiKey
U1: "MIC5504 Series 3.3 V 300 mA Surface Mount Fixed Single Output LDO - SOT-23-5", Case/Package=SOT-23, Dropout Voltage=160mV, LCSC Part=C88419, Manufacturer=Microchip, Manufacturer Lifecycle Status=REL, Max Junction Temperature (Tj)=125°C, Max Output current=300mA, Max Supply Voltage=5.5V, Min Current Limit=400mA, Min Input Voltage=2.5V, Min Operating Temperature=-40°C, Nominal Output Voltage=3.3V, Operating Supply Current=42µA, Output Voltage=3.3mV, Power Supply Rejection Ratio (PSRR)=60dB, Quiescent Current=38µA, Supplier Part Number=576-4764-6-ND, Accuracy=2%, Category="LDO Voltage Regulators", ComponentLink1Description=https://datasheet.octopart.com:443/MIC5504-3.3YM5-TR-Microchip-datasheet-178203070.pdf?src-supplier=Microchip, ComponentLink1URL=https://datasheet.octopart.com:443/MIC5504-3.3YM5-TR-Microchip-datasheet-178203070.pdf?src-supplier=Microchip, ComponentLink2Description=https://datasheet.octopart.com:443/MIC5504-3.3YM5-TR-Microchip-datasheet-137404938.pdf?src-supplier=Microchip, ComponentLink2URL=https://datasheet.octopart.com:443/MIC5504-3.3YM5-TR-Microchip-datasheet-137404938.pdf?src-supplier=Microchip, ComponentLink3Description=https://datasheet.octopart.com:443/MIC5504-3.3YM5-TR-Microchip-datasheet-138897052.pdf?src-supplier=SOS+electronic, ComponentLink3URL=https://datasheet.octopart.com:443/MIC5504-3.3YM5-TR-Microchip-datasheet-138897052.pdf?src-supplier=SOS+electronic, ComponentLink4Description=https://datasheet.octopart.com:443/MIC5504-3.3YM5-TR-Microchip-datasheet-61114938.pdf?src-supplier=element14+APAC, ComponentLink4URL=https://datasheet.octopart.com:443/MIC5504-3.3YM5-TR-Microchip-datasheet-61114938.pdf?src-supplier=element14+APAC, ComponentLink5Description=https://datasheet.octopart.com:443/MIC5504-3.3YM5-TR-Microchip-datasheet-33028821.pdf?src-supplier=Newark, ComponentLink5URL=https://datasheet.octopart.com:443/MIC5504-3.3YM5-TR-Microchip-datasheet-33028821.pdf?src-supplier=Newark, ComponentLink6Description=https://datasheet.octopart.com:443/MIC5504-3.3YM5-TR-Microchip-datasheet-137453438.pdf?src-supplier=Master+Electronics, ComponentLink6URL=https://datasheet.octopart.com:443/MIC5504-3.3YM5-TR-Microchip-datasheet-137453438.pdf?src-supplier=Master+Electronics, ComponentLink7Description=https://datasheet.octopart.com:443/MIC5504-3.3YM5-TR-Microchip-datasheet-142675560.pdf?src-supplier=TME, ComponentLink7URL=https://datasheet.octopart.com:443/MIC5504-3.3YM5-TR-Microchip-datasheet-142675560.pdf?src-supplier=TME, ComponentLink8Description=http://sigma.octopart.com:80/188454461/materials_sheet/Microchip-MIC5504-3.3YM5-TR.pdf?src-supplier=Compliance+Statements, ComponentLink8URL=http://sigma.octopart.com:80/188454461/materials_sheet/Microchip-MIC5504-3.3YM5-TR.pdf?src-supplier=Compliance+Statements, ComponentLink9Description=http://sigma.octopart.com:80/rohs_statement/Microchip-company-71.pdf?src-supplier=Compliance+Statements, ComponentLink9URL=http://sigma.octopart.com:80/rohs_statement/Microchip-company-71.pdf?src-supplier=Compliance+Statements, ComponentLink10Description=http://sigma.octopart.com:80/reach_statement/Microchip-company-70.pdf?src-supplier=Compliance+Statements, ComponentLink10URL=http://sigma.octopart.com:80/reach_statement/Microchip-company-70.pdf?src-supplier=Compliance+Statements, ComponentLink11Description=http://sigma.octopart.com:80/conflict_mineral_statement/Microchip-company-69.pdf?src-supplier=Compliance+Statements, ComponentLink11URL=http://sigma.octopart.com:80/conflict_mineral_statement/Microchip-company-69.pdf?src-supplier=Compliance+Statements, ComponentLink12Description=http://sigma.octopart.com:80/conflict_mineral_statement/Microchip-company-68.pdf?src-supplier=Compliance+Statements, ComponentLink12URL=http://sigma.octopart.com:80/conflict_mineral_statement/Microchip-company-68.pdf?src-supplier=Compliance+Statements, Country of Assembly=Thailand, Country of Fabrication="South Korea", Country of Origin=Thailand, Export Control Classification Number (ECCN) Code=EAR99, Harmonized Tariff Schedule (HTS) Code=8542.39.0060, Height=1.45mm, HS Code=8542.39.0090, Lead Free="Lead Free", Length=2.9mm, Lifecycle Status=Production, Manufacturer Part Number=MIC5504-3.3YM5-TR, Max Operating Temperature=125°C, Min Supply Voltage=2.5V, Mounting Technology="Surface Mount", Number of Channels=1, Number of Outputs=1, Number of Regulators=1, Output Current=300mA, Output Type=Fixed, Packaging="Cut Tape", Pins=5, Pricing="1=0,16, 25=0,1224 (USD)", Projected EOL Date=2039-05-20, REACH SVHC=No, RoHS=Compliant, Schedule B="8542390000, 8542390000|8542390000|8542390000|8542390000|8542390000", Stock=122252, Supplier=DigiKey, Width=1.6mm
U2: "ESP32-S3-PICO-1 Is A System-in-p", Manufacturer="Espressif Systems", Supplier Part Number=1965-ESP32-S3-PICO-1-N8R2DKR-ND, Category="RF Transceiver Modules and Modems", Manufacturer Part Number=ESP32-S3-PICO-1-N8R2, Pricing="1=6,1, 10=5,281, 25=4,9968, 100=4,6063, 250=4,37224, 500=4,20692, 1000=4,05122 (USD)", Stock=1099, Supplier=DigiKey

## Via types
v1: diameter 17.72, hole 7.87, L1 to L4, tented both sides, 100 vias
v2: diameter 27.56, hole 11.81, L1 to L4, tented both sides, 92 vias

## Nets (pads, with @x,y where several pads share a name; then routed paths per layer and width w, separated by ;. In a path a pad name is that pad's centre, name@x,y a point inside that pad or via, vN(x,y) a via of type N, cw(c..) or ccw(c..) an arc to the next point about the centre after c; other vN are vias at no path point)
+3V3: C2.2 C12.2 C13.2 C14.2 C15.2 C19.2 C20.1 H1.1 H3.1 J3.7 L3.2 R3.1 TF1.4 U1.5 | length 4198.7
  L1 w8: J3.7 1651.15,786.13 1676.13,786.13 v1(1692,802)
  L1 w20: H3.1 521.93,198.05 521.93,213.8 533,224.87 533,437 550,454 828,454 828.34,453.66 ; TF1.4 828.34,453.66 ; C15.2 v1(842,440) 828.34,453.66 ; H1.1 1453.18,133.82 v1(1454,133) ; R3.1 1607.39,908.39 v1(1608,909) ; v1(1821,444) L3.2
  L3(PWR) w20: v1(1454,133) 1219,133 1112,240 1112,321 1072,361 885,361 842,404 v1(842,440) ; v1(1692,802) 1692,846 1629,909 v1(1608,909) 1599,918 943,918 842,817 v1(842,440) ; v1(1821,444) 1821,504 1748,577 1447,577 1310,440 v1(842,440)
+5V_USB: C1.2 C3.2 J1.01 U1.1 U1.3 | length 460.6
  L1 w20: J1.01 225.44,463.11 321.9,463.11 C1.2 C3.2@365.82,463.01 ; C3.2 367.63,462.38 390.73,462.38 402.44,450.66 402.44,409.56 ; U1.3 414.16,328.6 402.44,340.31 402.44,409.56 ; U1.1 419.72,403.4 408,415.12 402.44,409.56
EN: C11.1 R3.2 R4.2 U2.4 | length 735.1
  L1 w8: U2.4 1503.74,624.74 1521.01,642.01 C11.1 ; R4.2 1545.44,853.17 R3.2 1712.39,849.61 1738,824 1738,663 1716.5,641.5 v1(1610.5,641.5) C11.1@1575.5,641.5
GND: C1.1 C2.1 C3.1 C4.1 C5.1 C6.1 C7.1 C8.1 C9.2 C10.2 C11.2 C12.1 C13.1 C14.1 C15.1 C16.2 C17.1 C18.2 C19.1 C20.2 C21.1 H1.4 H3.4 IC1.4 J1.04 J1.S1 J1.S2 J3.2 SW1.1 SW1.3 TF1.6 TF1.CD TF1.G1 TF1.G2 TF1.G3 TF1.G4 U1.2 U2.57 | length 1491.7
  L1 w8: J1.04 J1.04@226.14,738
  L1 w10: J3.2 1650.31,686.71 1688.29,686.71 v1(1689,686)
  L1 w20: J1.04@226.14,738 v1(292,738) ; C4.1 v1(342.99,538.17) ; C5.1 v1(342.99,662.18) ; v1(322,396) C1.1 ; v1(367,396) C3.1 ; v1(436,366) U1.2 ; TF1.G4@482,973.2 v1(482,1041.99) ; v1(517,543) 517.32,543.31 TF1.G2 ; v1(642,328) C2.1 ; H3.4 663.82,242.82 v1(664,243) ; v1(692,328) C12.1 ; v1(742,328) C13.1 ; v1(792,328) C14.1 ; v1(842,328) C15.1 ; v1(860,276) IC1.4 ; TF1.6 v1(915,500) v1(915,500) ; TF1.CD 1044.87,501.13 v1(1045,501) ; v1(1089,550) 1089,603.94 TF1.G1 ; TF1.G3@1092,973.2 v1(1092,1033.99) ; v1(1131,711) C17.1 ; v1(1219.77,1022.85) SW1.1 ; C21.1 v1(1312.99,388.99) ; SW1.3 v1(1512.23,1022.85) ; v1(1502,744) C20.2 ; C18.2 v1(1569,964) ; C11.2 v1(1611,608) ; C19.1 v1(1607,744) ; H1.4 1600.82,244.82 v1(1601,245) ; C9.2 1605.18,506.99 1632.59,479.58 v1(1632.59,463.87) ; C7.1 v1(1662,342) ; C10.2 1673.18,506.99 1691.65,488.53 v1(1691.65,463.87) ; v1(1763,444) C16.2 ; C6.1 v1(1852,344) ; v1(1880,181) C8.1
  other v1: 1247.63,619.86 1277.63,619.86 1307.63,619.86 1337.63,619.86 1367.14,619.86 1247.63,649.86 1277.63,649.86 1307.63,649.86 1337.63,649.86 1367.63,649.86 1247.63,679.86 1277.63,679.86 1307.63,679.86 1337.63,679.86 1367.63,679.86 1247.63,709.86 1277.63,709.86 1307.63,709.86 1337.63,709.86 1367.63,709.86 1247.63,739.86 1277.63,739.86 1307.63,739.86 1337.63,739.86 1367.63,739.86
  other v2: 1062.99,39.37 1456.69,39.37 1614.17,39.37 1967.24,50.49 1850.39,78.74 39.37,118.11 157.48,118.11 275.59,118.11 511.81,118.11 629.92,118.11 1967.24,129.23 1771.65,157.48 905.51,196.85 1220.47,196.85 1701,238 1771,238 1841,238 1905,238 1547,265 39.37,275.59 157.48,275.59 275.59,275.59 433.07,275.59 748.03,275.59 1062.99,275.59 1338.58,314.96 1503,323 1599,323 1705,326 1911,326 1778,327 1967.24,326.08 354.33,354.33 1569,376 1500,385 1692.91,393.7 1967.24,404.82 1889.76,433.07 1563,435 1499,442 39.37,472.44 984.25,472.44 1967.24,483.56 1563,489 1499,494 393.7,511.81 629.92,511.81 1499,542.61 1564.68,542.61 1889.76,551.18 1967.24,562.3 39.37,590.55 629.92,590.55 1967.24,641.04 905.51,669.29 1889.76,669.29 39.37,708.66 472.44,708.66 748.03,708.66 1967.24,719.78 984.25,748.03 1811.02,748.03 813,756 511.81,787.4 1967.24,798.52 1889.76,826.77 354.33,866.14 1421,878 1967.24,877.26 659,909 1294,952 1967.24,956 1402,957 78.74,984.25 236.22,984.25 354.33,984.25 590.55,984.25 826.77,984.25 1180,985 1692.91,984.25 1614.17,1023.62 1850.39,1023.62 1967.24,1034.74 78.74,1102.36 236.22,1102.36 433.07,1102.36 590.55,1102.36 748.03,1102.36 905.51,1102.36 1614.17,1102.36 1075.19,1103.1 1967.24,1113.48
GPIO1: H2.1 U2.6 | length 993.7
  L1 w8: H2.1 1013,192.09 v1(1013,137) ; v1(1416,657) 1416.7,656.3 1441.43,656.3 U2.6
  L4 w8: v1(1013,137) 1047,103 1316,103 1416,203 v1(1416,657)
GPIO2: H2.2 U2.7 | length 1248.5
  L1 w8: v1(1061,137) 1061,191.3 H2.2 ; U2.7 v1(1473,672)
  L4 w8: v1(1061,137) 1041,157 988,157 977,146 977,97 992,82 1342,82 1443,183 1443,642 v1(1473,672)
GPIO3: H2.3 U2.8 | length 858.3
  L1 w8: v1(1111,137) 1111,192.09 H2.3 ; v1(1416,687) 1416.67,687.67 1441.43,687.67 U2.8
  L4 w8: v1(1111,137) 1283,137 1393,247 1393,664 v1(1416,687)
LCD_CS: J3.8 U2.12 | length 251.5
  L1 w8: U2.12 1441.55,750.66 1483.21,750.66 1492.52,759.98 1492.52,794.52 1502.9,804.9 J3.8
LCD_LEDA: R5.1 U2.9 | length 82.9
  L1 w8: U2.9 1472.07,703.48 1488.35,687.2 1515.97,687.2 R5.1
LCD_RESET: J3.3 U2.10 | length 214
  L1 w8: U2.10 1479.77,719.23 1492.53,706.47 J3.3
LCD_RS: J3.4 U2.11 | length 219.4
  L1 w8: U2.11 1484.02,734.98 1500.53,718.47 1624.34,718.47 1625.26,719.39 1627.89,719.39 1632.57,724.08 1632.57,725.24 1633.5,726.16 J3.4
LCD_SCL: J3.6 U2.14 | length 301.3
  L1 w8: U2.14@1450.28,782.28 1459.14,791.14 1467.14,791.14 v1(1469,793) ; J3.6 1684.9,765.53 1690.37,771 v1(1693,771)
  L4 w8: v1(1469,793) 1671,793 v1(1693,771)
LCD_SDA: J3.5 U2.13 | length 310.2
  L1 w8: U2.13 1441.55,766.54 1464.67,766.54 1466.66,768.52 v1(1469.29,768.52) ; J3.5 1683.83,745.84 1690.67,739 v1(1693,739)
  L4 w8: v1(1469.29,768.52) 1471.08,766.72 1665.28,766.72 v1(1693,739)
NetC6_2: C6.2 J2.1 L1.2 L2.1 | length 343.9
  L1 w8: L1.2 ccw(c1791.36,281) 1791.36,278.99 C6.2 1885.99,278.99 1950,279 L2.1 2020.65,279.35 cw(c2020.65,231) 2069,231 2069,199.02 cw(c2067,199.02) J2.1
NetC7_2: C7.2 L1.1 U2.1 | length 558
  L1 w8: U2.1 1506.61,577.5 cw(c1506.61,551) 1533.11,551 1533.11,357 ccw(c1609.89,357) 1609.89,280.22 1660.77,280.22 cw(c1660.77,278.99) C7.2 cw(c1664.01,278.99) 1664.01,281 L1.1
NetC8_2: C8.2 L2.2 | length 53.7
  L1 w8.5: C8.2 L2.2
NetC18_1: C18.1 R4.1 SW1.2 SW1.4 | length 471.6
  L1 w8: SW1.2 1263.7,1081.84 1427,1081.84 ; SW1.4 1468.3,1081.84 1427,1081.84 ; R4.1 1488,910.67 1502.99,925.66 C18.1 1452,964 1427,989 1427,1081.84
NetJ3_1: J3.1 R5.2 | length 89.2
  L1 w8: R5.2 1598.13,686 1616.57,667.55 1649.78,667.55 J3.1
P3V3: C9.1 C10.1 C16.1 L3.1 U2.2 U2.3 | length 540.7
  L1 w8: U2.2 1554.76,593.24 ; U2.3 1539.01,608.99 1554.76,593.24 ; L3.1@1814,517.01 C16.1 1729.91,517.01 1705.41,541.5 1672.5,541.5 C10.1 C9.1 1604,569 1593,580 1568,580 1554.76,593.24
RXD: H1.3 U2.49 | length 692.8
  L1 w8: U2.49@1299.82,537.2 1299.82,522.58 1359,463.4 1359,368.44 1414,313.44 1414,125 1436,103 1546.92,103 1551.61,107.69 H1.3
SCL: H3.3 U2.24 | length 1392.7
  L1 w8: H3.3 615,192.69 v1(615,249) ; v1(1268,885.14) 1268.2,884.94 1268.2,813.78 U2.24
  L4 w8: v1(615,249) 594,270 594,792 687.14,885.14 v1(1268,885.14)
SDA: H3.2 U2.23 | length 1548.4
  L1 w8: H3.2 v1(565.39,247.39) ; U2.23 1284.07,813.78 1284.07,831.91 1292,839.84 v1(1292,885.14)
  L4 w8: v1(565.39,247.39) 565.39,867.39 635.78,937.78 1275.22,937.78 1292,921 v1(1292,885.14)
SDIO_CLK: TF1.5 U2.15 | length 759.1
  L1 w8: TF1.5@871.23,556.3 v1(871.23,615) ; v1(1409.99,790.18) U2.15
  L4 w8: v1(871.23,615) 871.23,713.23 929.13,771.13 1404.55,771.13 1409.99,776.57 v1(1409.99,790.18)
SDIO_CMD: TF1.3 U2.16 | length 1215.7
  L1 w8: TF1.3@784.61,556.3 v1(784.61,615) ; U2.16 v1(1394.24,837.25)
  L4 w8: v1(784.61,615) 784.61,595.69 779.93,591 680,591 622,649 622,737 751,866 1365.5,866 v1(1394.24,837.25)
SDIO_D0: TF1.7 U2.17 | length 1252.7
  L1 w8: TF1.7@957.84,556.3 v1(957.84,615) ; v1(1378.5,790.18) U2.17
  L4 w8: v1(957.84,615) 957.67,614.83 957.67,596.67 946,585 837,585 819.31,602.69 819.31,624.69 806,638 688,638 672,654 672,725 756,809 1359.68,809 v1(1378.5,790.18)
SDIO_D1: TF1.8 U2.18 | length 775.7
  L1 w8: TF1.8@1001.15,556.3 v1(1001.15,615) ; U2.18 v1(1362.75,837.25)
  L4 w8: v1(1001.15,615) 1001.15,721.15 1037.72,757.72 1432.72,757.72 1441,766 1441,802 1431,812 1388,812 v1(1362.75,837.25)
SDIO_D2: TF1.1 U2.19 | length 868.2
  L1 w8: v1(698,665) 698,556.3 TF1.1 ; v1(1347,790.18) U2.19
  L4 w8: v1(698,665) 698,724 764.18,790.18 v1(1347,790.18)
SDIO_D3: TF1.2 U2.20 | length 997.7
  L1 w8: TF1.2@741.31,556.3 v1(741.31,614.6) ; U2.20 1331.31,813.78 v1(1331.31,837.31)
  L4 w8: v1(741.31,614.6) 685.4,614.6 648,652 648,732 740.21,824.21 1276.37,824.21 1289.47,837.31 v1(1331.31,837.31)
SPICLK: IC1.6 U2.41 | length 384.5
  L1 w8: U2.41 U2.41 1193.19,593.18 1198.37,588 v1(1201,588) ; IC1.6 1207.97,326.5 1258.5,326.5 v1(1259,327)
  L4 w8: v1(1201,588) 1201,353.97 1227.97,327 v1(1259,327)
SPICS0: IC1.1 U2.39 | length 429.2
  L1 w8: IC1.1 1095,426 1127,458 1127,611 1140.74,624.74 U2.39
SPID: IC1.5 U2.40 | length 496.7
  L1 w8: U2.40 U2.40 1190.61,609.06 1196.5,614.94 v1(1199.12,614.94) ; IC1.5 1208.47,277 1259,277 v1(1260,278)
  L4 w8: v1(1199.12,614.94) 1180.94,614.94 1166,600 1166,346 1234,278 v1(1260,278)
SPIHD: IC1.7 U2.38 | length 492.9
  L1 w8: v1(1143,649) 1143.66,649 1152.17,640.49 U2.38 ; IC1.7 1232.67,376 1250.81,357.86 1263.14,357.86 v1(1265,356)